# Altium PCB U_I_Meter_Bottom_ACS712.PcbDoc
Units mm, origin at the board's own origin, x right, y up, seen from the top; angles counter-clockwise.
Board outline 67 x 84 mm, 2 copper layers (Top Layer, Bottom Layer), stack 1.071 mm thick; 47 components, 21 nets, 113 pads, 119 vias.
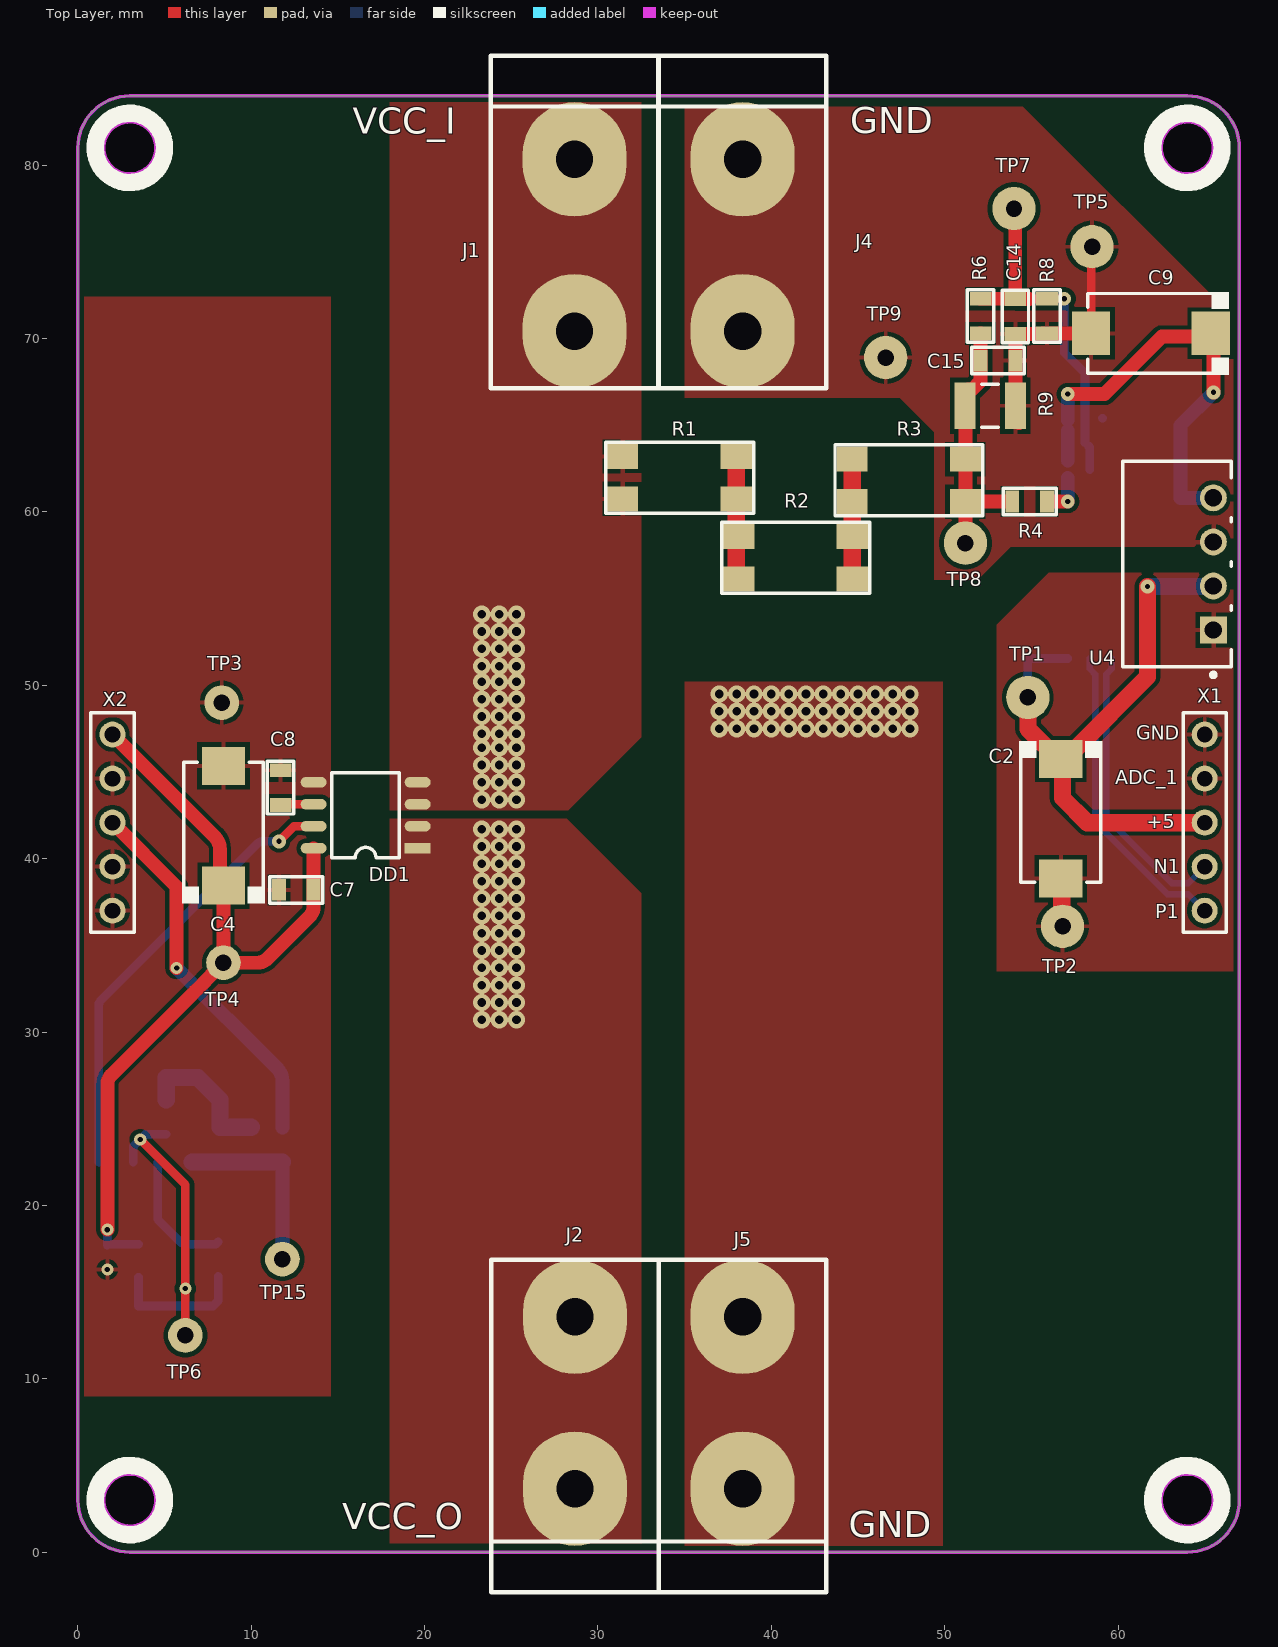
[diagram p0: Top Layer view]
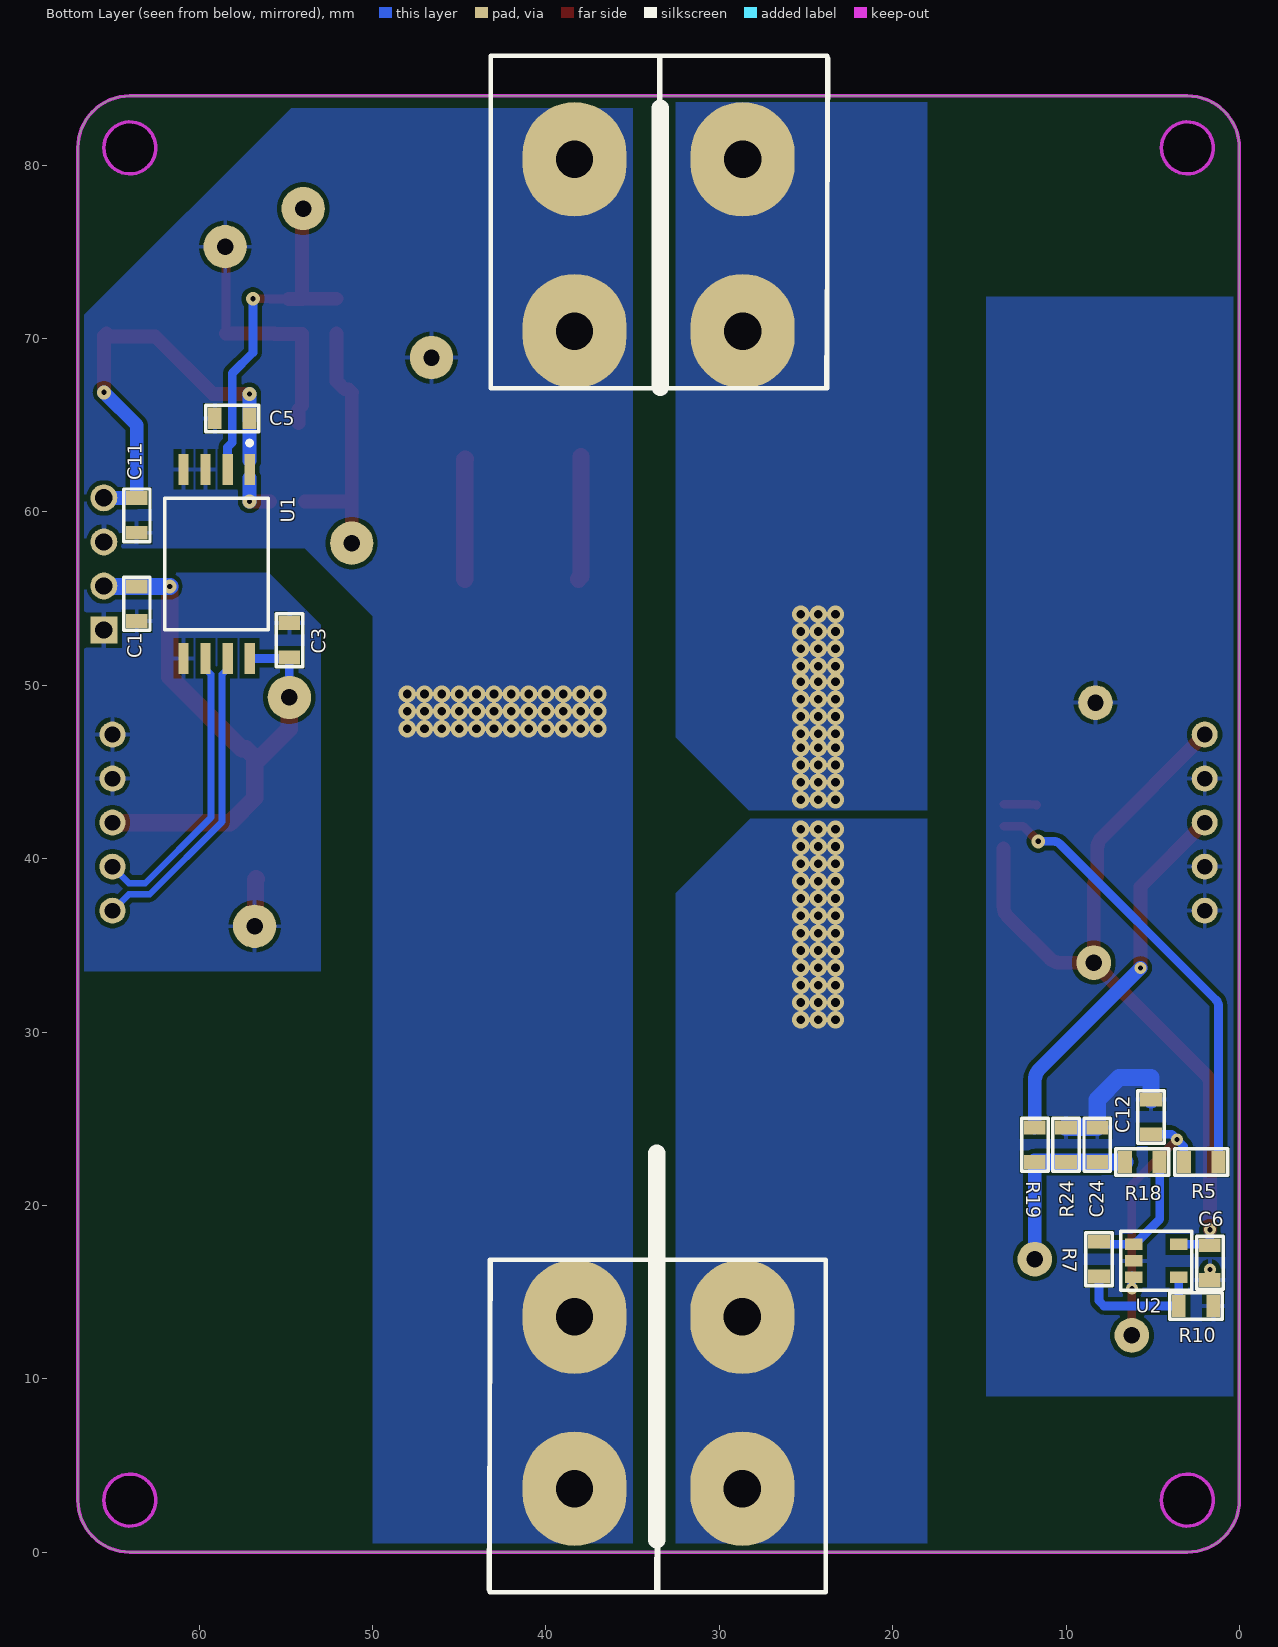
[diagram p1: Bottom Layer view, seen from below]
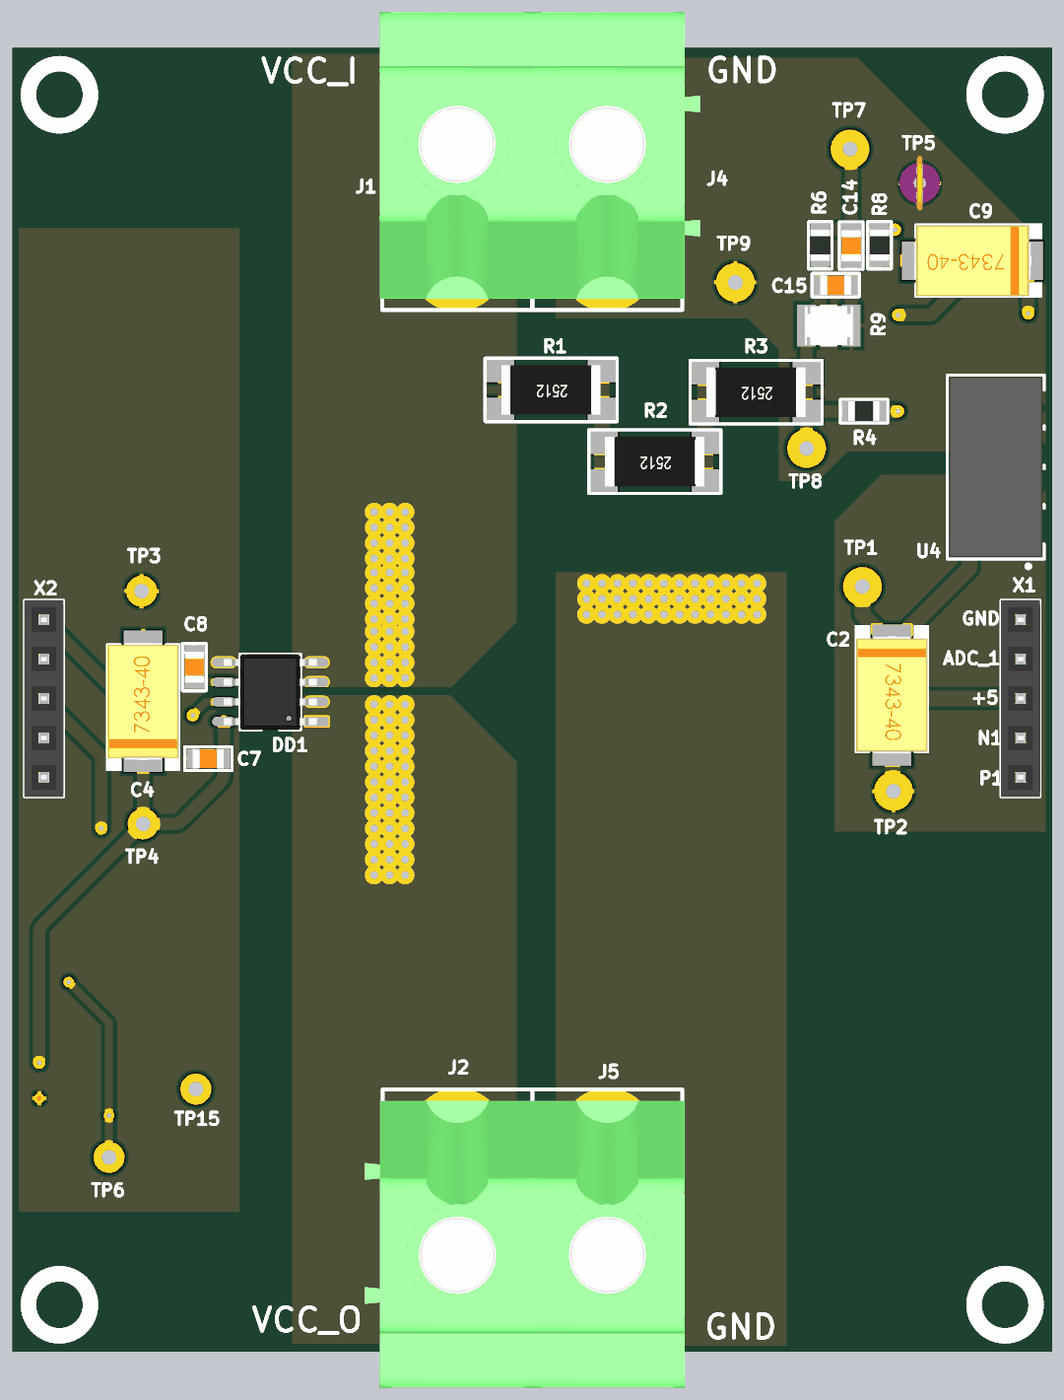
[diagram p2: 3D render of the assembled board from above, using the file's embedded part models]
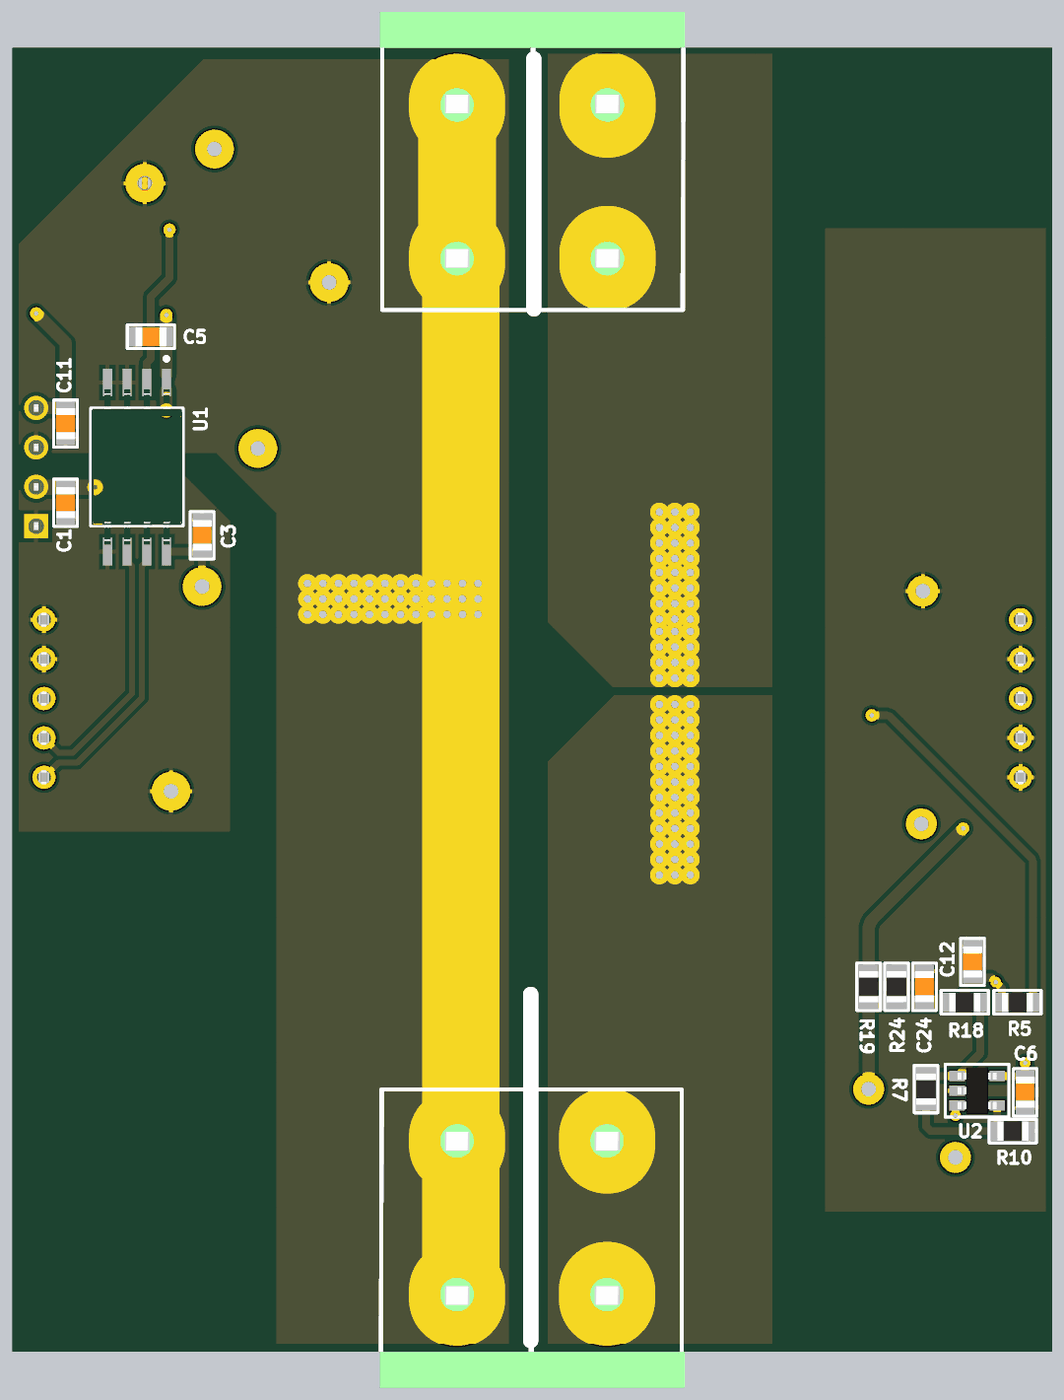
[diagram p3: 3D render of the assembled board from below, using the file's embedded part models]

## Layer stack, top to bottom
Top Solder: solder mask 0.0102, Solder Resist, Dk 3.5
Top Layer: signal copper 0.0356
Dielectric 1: dielectric 1, FR-4, Dk 4.8
Bottom Layer: signal copper 0.0356
Bottom Solder: solder mask 0.0102, Solder Resist, Dk 3.5

## Board outline
3,0 cw(c3,3) 0,3 0,81 cw(c3,81) 3,84 64,84 cw(c64,81) 67,81 67,3 cw(c64,3) 64,0
cut-out: 62.5,3 ccw(c64,3) 64,1.5 ccw(c64,3) 65.5,3 ccw(c64,3) 64,4.5 ccw(c64,3)
cut-out: 3,1.5 cw(c3,3) 1.5,3 cw(c3,3) 3,4.5 cw(c3,3) 4.5,3 cw(c3,3)
cut-out: 3,79.5 cw(c3,81) 1.5,81 cw(c3,81) 3,82.5 cw(c3,81) 4.5,81 cw(c3,81)
cut-out: 64,79.5 cw(c64,81) 62.5,81 cw(c64,81) 64,82.5 cw(c64,81) 65.5,81 cw(c64,81)

## Design rules (kind name [scope] priority, off if disabled: settings)
Clearance [All] p1: gap=0.254 ignorepadtopadclearanceinfootprint=FALSE
ComponentClearance [All] p1: gap=-1 collisioncheckmode=3 verticalgap=0 showdistances=FALSE
DiffPairsRouting [All] p1: maxlimit=0.254 minlimit=0.254 mostfreqgap=0.254 toplayer_minwidth=0.381 toplayer_maxwidth=0.381 toplayer_prefwidth=0.381 bottomlayer_minwidth=0.381 bottomlayer_maxwidth=0.381 bottomlayer_prefwidth=0.381 maxuncoupledlength=12.7
Height [All] p1: minheight=-1 maxheight=50 prefheight=12.7
PolygonConnect [All] p1: connectstyle=Relief reliefconductorwidth=0.254 reliefentries=4 polygonreliefangle="90 Angle" airgapwidth=0.254
RoutingVias [All] p1: holewidth=0.711 width=1.27 viastyle="Through Hole" minholewidth=0.711 minwidth=1.27 maxholewidth=0.711 maxwidth=1.27
SolderMaskExpansion [All] p1: expansion=0.102 istentingtop=FALSE
Width [All] p1: maxlimit=10 minlimit=0.254 preferedwidth=0.254 minimp=50.000000 maximp=50.000000 favimp=50.000000
27 further rules are at their usual default settings.

## Classes and differential pairs
differential pair OUT: +OUT_P -OUT_N

## Components (designator, comment, footprint, x,y, rotation, side; value= is the part's Value field where it differs from the comment)
C1 "0.1uF" CAP-0805 63.6,54.7 r270 bottom
C2 "47uF_16V" CAP-TAN-D 56.7,42.3 r270 top
C3 "0.1uF" CAP-0805 54.8,52.6 r90 bottom
C4 "100uF_16V" CAP-TAN-D 8.4,41.9 r90 top
C5 "0.1uF" CAP-0805 58.1,65.4 r180 bottom
C6 "0.1uF" CAP-0805 1.7,16.7 r90 bottom
C7 "100nF" CAP-0805 12.6,38.2 r180 top
C8 "100nF" CAP-0805 11.7,44.1 r90 top
C9 "100uF_16V" CAP-TAN-D 61.9,70.3 r180 top
C11 "0.1uF" CAP-0805 63.6,59.8 r270 bottom
C12 "270pF" CAP-0805 5.1,25.1 r270 bottom
C14 "0.33uF" CAP-0805 54.075,71.275 r90 top
C15 "0.1uF" CAP-0805 53.075,68.725 r180 top
C24 "220pF" CAP-0805 8.2,23.5 r270 bottom
DD1 "ACS712" SO8-150 16.6,42.5 r180 top
J1 "MG_136_HT" Conn_MEIGAN_MG136HT 28.65,77.8 r180 top
J2 "MG_136_HT" Conn_MEIGAN_MG136HT 28.675,6.2 r0 top
J4 "MG_136_HT" Conn_MEIGAN_MG136HT 38.35,77.8 r180 top
J5 "MG_136_HT" Conn_MEIGAN_MG136HT 38.35,6.2 r0 top
R1 "" RES-2512 34.7,61.975 r180 top
R2 "" RES-2512 41.4,57.35 r180 top
R3 "" RES-2512 47.925,61.825 r180 top
R4 "" RES-0805 54.9,60.6 r0 top
R5 "1K" RES-0805 2.2,22.5 r0 bottom
R6 "1K" RES-0805 52.075,71.3 r90 top
R7 "1K" RES-0805 8.1,16.9 r90 bottom
R8 "1M" RES-0805 55.9,71.3 r90 top
R9 "RES_1210" RES_SMD_1210_IPC_B 52.625,66.125 r180 top
R10 "100K" RES-0805 2.5,14.2 r0 bottom
R18 "10K" RES-0805 5.6,22.5 r0 bottom
R19 "1K" RES-0805 11.8,23.5 r90 bottom
R24 "36K" RES-0805 10,23.5 r270 bottom
TP1 "Test_Point_PCB" Test_Point#1 54.8,49.3 r0 top
TP2 "Test_Point_PCB" Test_Point#1 56.8,36.1 r0 top
TP3 "Test_Point_PCB" Test_Point#2 8.3,49 r0 top
TP4 "Test_Point_PCB" Test_Point#2 8.4,34 r0 top
TP5 "Test_Point_PCB" Pin_Test_Point(Pink) 58.5,75.3 r0 top
TP6 "Test_Point_PCB" Test_Point#2 6.2,12.5 r0 top
TP7 "Test_Point_PCB" Test_Point#1 54,77.5 r0 top
TP8 "Test_Point_PCB" Test_Point#1 51.2,58.2 r90 top
TP9 "Test_Point_PCB" Test_Point#1 46.6,68.9 r0 top
TP15 "Test_Point_PCB" Test_Point#2 11.8,16.9 r90 top
U1 "AMC1311" FP-DWV0008A-MFG 59,57 r270 bottom locked
U2 "MCP6001T-I/OT" SOT23-5 4.8,16.8 r180 bottom
U4 "B0505S-1W" B0505S-1W 63.4,57 r90 top locked
X1 "CONN-5-PIN" CONN-PLS-5-2.54mm 65,37 r90 top locked
X2 "CONN-5-PIN" CONN-PLS-5-2.54mm 2,37 r90 top locked

## Footprints (in the part's own frame and the unit in brackets; to place one, negate y for a bottom-side part, rotate by r counter-clockwise, add the part's x,y. Pads: shape width x height; smd on the part's side, far side on the other; paste and mask are expansions set on the pad)
B0505S-1W [mm]
  rect 1.55x1.55 hole 1 paste-2539.97 mask+0: 1(-3.81,-2.1)
  round 1.55 hole 1 paste-2539.97 mask+0: 2(-1.27,-2.1) 3(1.27,-2.1) 4(3.81,-2.1)
  silkscreen extent -6.52,-3.13 5.92,3.13, body extent -6.02,-3.22 6.02,3.22, height 0.25
CAP-0805 [mm]
  rect 0.8x1.25 smd mask+0.015: 1(-1,0) 2(1,0)
  silkscreen extent -1.52,-0.76 1.52,0.76, body extent -1,-0.62 1,0.63, height 0.8
CAP-TAN-D [mm]
  rect 2.2x2.5 smd: 1(-3.45,0) 2(3.45,0)
  silkscreen extent -4.5,-2.4 3.65,2.4, body extent -3.8,-2.3 3.8,2.3, height 4
CONN-PLS-5-2.54mm [mm]
  round 1.5 hole 0.9: 1(0,0) 2(2.54,0) 3(5.08,0) 4(7.62,0) 5(10.16,0)
  silkscreen extent -1.25,-1.25 11.41,1.25, body extent -1.27,-1.27 11.43,1.27, height 8.4
Conn_MEIGAN_MG136HT [mm]
  oval 6x6.6 hole 2.159: 1(0,7.366) 1(0,-2.54)
  silkscreen extent -4.83,-8.51 4.83,10.67, body extent -6,-8.55 5,9.95, height 30.95
FP-DWV0008A-MFG [mm]
  rect 1.8x0.6 smd paste+0 mask+0: 1(-5.45,1.905) 2(-5.45,0.635) 3(-5.45,-0.635) 4(-5.45,-1.905) 5(5.45,-1.905) 6(5.45,-0.635) 7(5.45,0.635) 8(5.45,1.905)
  silkscreen extent -7.1,-2.98 3.8,2.98, body extent -5.75,-2.93 5.75,2.93, height 2.8
Pin_Test_Point(Pink) [mm]
  round 2.5 hole 0.95: 1(0,0)
  body extent -1.3,-1.78 1.3,1.78, height 6.93
RES-0805 [mm]
  rect 0.8x1.25 smd mask+0.015: 1(-1,0) 2(1,0)
  silkscreen extent -1.52,-0.76 1.52,0.76, body extent -1,-0.62 1,0.63, height 0.6
RES-2512 [mm]
  rect 1.8x1.45 smd: 1(-3.275,-1.225) 1(-3.275,1.225) 2(3.275,-1.225) 2(3.275,1.225)
  silkscreen extent -4.28,-2.05 4.25,2.05, body extent -3.2,-1.6 3.2,1.6, height 0.6
RES_SMD_1210_IPC_B [mm]
  rect 1.205x2.706 smd paste+0 mask+0: 1(-1.451,0) 2(1.451,0)
  silkscreen extent -0.47,-1.25 0.47,1.25, body extent -2.3,-1.6 2.3,1.6, height 0.25
SO8-150 [mm]
  rect 1.5x0.6 smd: 1(-3,1.9)
  oval 1.5x0.6 smd: 2(-3,0.63) 3(-3,-0.64) 4(-3,-1.91) 5(3,-1.91) 6(3,-0.64) 7(3,0.63) 8(3,1.9)
  silkscreen extent -1.95,-2.45 1.95,2.45, body extent -3,-2.45 3,2.45, height 1.7
SOT23-5 [mm]
  rect 1x0.66 smd: 1(-1.3,0.95) 2(-1.3,0) 3(-1.3,-0.95) 4(1.3,-0.95) 5(1.3,0.95)
  silkscreen extent -2.05,-1.7 2.05,1.7, body extent -1.25,-1.5 1.25,1.5, height 1.08
Test_Point#1 [mm]
  round 2.5 hole 0.95: 1(0,0)
Test_Point#2 [mm]
  round 2 hole 0.95: 1(0,0)

## Part data
C1 C3 C5 C6 C11 C12 C14 C15 C24: library part CAP-NON-POLAR
C2: library part CAP-POLAR
C4 C9: library part CAP_POL_SMD
C7 C8: library part CAP-NON-POLAR, "270pF"
J1 J2 J4 J5: library part Connector_MEIGAN_MG136HT
R1 R2 R3 R4 R5 R6 R8 R10 R18 R24: library part RES-CONST
R7 R19: library part RES-CONST, "10K"
TP1 TP2 TP3 TP4 TP5 TP6 TP7 TP8 TP9 TP15: library part TP_PCB?, "Test_Point"
U2: library part MCP6001T, "IC OPAMP GP 1 CIRCUIT SOT23-5", Case/Package=SOT-23, Input Bias Current=1pA, Input Offset Voltage (Vos)=4.5mV, Max Operating Temperature=85°C, Max Supply Voltage=6V, Min Operating Temperature=-40°C, Min Supply Voltage=1.8V, Nominal Supply Current=100uA, Operating Supply Voltage=5.5V, Output Current=23mA, Package Quantity=1, Power Supply Rejection Ratio (PSRR)=86dB, Voltage Gain=112dB, Bandwidth=1MHz, Common Mode Rejection Ratio=60dB, Contact Plating=Tin, Gain Bandwidth Product=1MHz, Height=1.3mm, Lead Free="Lead Free", Length=3.1mm, Mount="Surface Mount", Number of Amplifiers=1, Number of Channels=1, Number of Circuits=1, Number of Elements=1, Number of Pins=5, Operating Supply Current=100uA, Output Current per Channel=23mA, Packaging="Tape and Reel", Radiation Hardening=No, REACH SVHC="No SVHC", Slew Rate=0.6V/µs, Unity Gain Bandwidth Product=1MHz, Voltage=6V, Width=1.8mm

## Via types
v1: diameter 1, hole 0.5, Top Layer to Bottom Layer, 108 vias
v2: diameter 0.8, hole 0.3, Top Layer to Bottom Layer, 6 vias
v3: diameter 0.7, hole 0.3, Top Layer to Bottom Layer, 5 vias

## Nets (pads, with @x,y where several pads share a name; then routed paths per layer and width w, separated by ;. In a path a pad name is that pad's centre, name@x,y a point inside that pad or via, vN(x,y) a via of type N, cw(c..) or ccw(c..) an arc to the next point about the centre after c; other vN are vias at no path point)
+5: C1.1 C2.1 C3.1 TP1.1 U1.8 U4.2 X1.3 | length 35.9
  Top Layer w1: TP1.1 54.804,49.296 54.804,47.496 C2.1@56.625,45.675 ; C2.1 57.3,46.35 57.55,46.35 61.7,50.5 v2(61.7,55.7) ; C2.1@56.8,45.5 56.8,43.5 58.22,42.08 X1.3
  Bottom Layer w0.5: C3.1@54.65,51.55 C3.1@54.8,51.55 ; TP1.1@54.8,49.3 C3.1@54.8,51.55 ; C3.1 C3.1@54.8,51.55 ; U1.8 C3.1@54.8,51.55
  Bottom Layer w1: v2(61.7,55.7) U4.2@65.47,55.7
+5V_I: C4.1 C6.2 C7.1 DD1.8 TP4.1 U2.5 X2.5 | length 46.9
  Top Layer w0.8: v3(1.7,18.6) 1.7,26.969 cw(c2.5,26.969) 1.934,27.534 ; 1.934,27.534 6.718,32.318 cw(c7.282,31.751) 6.79,32.381 ccw(c6,33.4) 6.919,32.496 7.888,33.488 cw(c8.46,32.929) 7.893,33.493 TP4.1 10.369,34 ccw(c10.369,34.8) 10.934,34.234 13.366,36.666 ccw(c12.8,37.231) 13.6,37.231 C7.1 DD1.8 ; X2.5 7.907,41.253 cw(c7.2,40.546) 8.2,40.546 8.2,39.05 C4.1 TP4.1@8.4,33.727
  Bottom Layer w0.5: v3(1.7,18.6) C6.2 1.75,17.75 U2.5
GND: C5.1 C9.2 C11.2 C14.1 C15.1 J4.1 J5.1 R8.1 R9.1 TP5.1 TP9.1 U1.3 U1.4 U4.3 | length 14.9
  Top Layer w0.5: C9.2 58.45,75.25 TP5.1
  Top Layer w0.8: J5.1@38.35,16.131 J5.1@38.5,16.281 ; R9.1@54.278,65.122 54.278,65.923 R9.1 54.076,68.725 54.076,70.275 55.65,70.275 55.675,70.3 C9.2
  other v1: 37,47.5 38,47.5 39,47.5 40,47.5 41,47.5 42,47.5 43,47.5 44,47.5 45,47.5 46,47.5 47,47.5 48,47.5 37,48.5 38,48.5 39,48.5 40,48.5 41,48.5 42,48.5 43,48.5 44,48.5 45,48.5 46,48.5 47,48.5 48,48.5 37,49.5 38,49.5 39,49.5 40,49.5 41,49.5 42,49.5 43,49.5 44,49.5 45,49.5 46,49.5 47,49.5 48,49.5
GND_III: C1.2 C2.2 C3.2 TP2.1 U1.5 U4.1 X1.4 X1.5 | length 2.8
  Top Layer w1: C2.2 56.75,38.8 56.75,36.15 TP2.1
GND_IV: C4.2 C6.1 C7.2 C8.2 C12.1 C24.1 DD1.5 R10.1 R24.1 TP3.1 U2.2 X2.1 X2.2 X2.4 | length 8.3
  Bottom Layer w1: C12.1 5.1,27.375 6.925,27.375 8.2,26.1 C24.1 R24.1
  other v3: 1.7,16.3
NetC8_1: C8.1 DD1.6 | length 1.9
  Top Layer w0.5: C8.1 12.075,43.14 DD1.6
NetC12_2: C12.2 R5.2 TP6.1 U2.3 | length 16.2
  Top Layer w0.5: v3(3.6,23.8) 6.2,21.2 TP6.1
  Bottom Layer w0.5: R5.2 3.2,23.4 v3(3.6,23.8) 3.9,24.1 C12.2 ; v3(6.2,15.2) U2.3@6.2,15.925
NetC14_2: C14.2 R6.2 R8.2 TP7.1 U1.2 | length 20.5
  Top Layer w0.5: 54.862,72.275 54.872,72.285 55.9,72.285 55.915,72.3 v2(56.9,72.3)
  Top Layer w0.8: R6.2 C14.2@54.075,72.3 ; TP7.1 54.075,77.425 C14.2@54.075,72.3 ; 54.862,72.275 C14.2 C14.2@54.075,72.3
  Bottom Layer w0.5: v2(56.9,72.3) 56.9,69.2 58.1,68 58.1,64 58.365,63.735 U1.2
NetC15_2: C15.2 R3.1 R4.1 R6.1 R9.2 TP8.1 | length 15.8
  Top Layer w0.8: TP8.1@51.2,57.7 R3.1@51.2,60.6 ; R6.1 C15.2 52.075,67.547 51.606,67.078 51.377,67.078 51.174,66.876 51.2,66.85 51.2,63.05 R3.1@51.2,60.6 ; R4.1 R3.1@51.2,60.6
NetC24_2: C24.2 R18.2 R19.1 R24.2 TP15.1 | length 10.8
  Bottom Layer w0.8: TP15.1 R19.1
  Bottom Layer w1: R18.2 C24.2@7.975,22.5 ; C24.2@7.975,22.5 R24.2 R19.1
NetDD1_1: DD1.1 DD1.2 J2.1
  other v1: 23.3,30.7 24.3,30.7 25.3,30.7 23.3,31.7 24.3,31.7 25.3,31.7 23.3,32.7 24.3,32.7 25.3,32.7 23.3,33.7 24.3,33.7 25.3,33.7 23.3,34.7 24.3,34.7 25.3,34.7 23.3,35.7 24.3,35.7 25.3,35.7 23.3,36.7 24.3,36.7 25.3,36.7 23.3,37.7 24.3,37.7 25.3,37.7 23.3,38.7 24.3,38.7 25.3,38.7 23.3,39.7 24.3,39.7 25.3,39.7 23.3,40.7 24.3,40.7 25.3,40.7 23.3,41.7 24.3,41.7 25.3,41.7
NetDD1_3: DD1.3 DD1.4 J1.1 R1.2
  other v1: 23.3,43.4 24.3,43.4 25.3,43.4 23.3,44.4 24.3,44.4 25.3,44.4 23.3,45.4 24.3,45.4 25.3,45.4 23.3,46.4 24.3,46.4 25.3,46.4 23.3,47.2 24.3,47.2 25.3,47.2 23.3,48.2 24.3,48.2 25.3,48.2 23.3,49.2 24.3,49.2 25.3,49.2 23.3,50.2 24.3,50.2 25.3,50.2 23.3,51.1 24.3,51.1 25.3,51.1 23.3,52.1 24.3,52.1 25.3,52.1 23.3,53.1 24.3,53.1 25.3,53.1 23.3,54.1 24.3,54.1 25.3,54.1
NetDD1_7: DD1.7 R5.1 | length 25.8
  Top Layer w0.5: v2(11.6,41) 12.47,41.87 DD1.7
  Bottom Layer w0.5: R5.1 1.2,31.493 cw(c1.7,31.493) 1.346,31.846 10.354,40.854 cw(c10.707,40.5) 10.707,41 v2(11.6,41)
NetR1_1: R1.1 R2.2 | length 7.1
  Top Layer w1: R1.1@37.975,63.2 37.975,60.75 37.975,56.275 R2.2@38.125,56.125
NetR2_1: R2.1 R3.2 | length 6.9
  Top Layer w1: R3.2@44.65,63.05 44.675,63.025 44.675,58.575 R2.1@44.675,56.125
NetR7_1: R7.1 R10.2 U2.4 | length 7.7
  Bottom Layer w0.5: R10.2 U2.4 ; R10.2@3.6,14.2 7.807,14.2 8.1,14.493 R7.1
NetR7_2: R7.2 R18.1 U2.1 | length 7.3
  Bottom Layer w0.5: R18.1 4.6,19.2 5.925,17.875 5.975,17.875 5.995,17.855 U2.1@5.995,17.825 ; U2.1 7.95,17.75 R7.2
NetR19_2: R19.2 X2.3 | length 21.6
  Top Layer w0.8: X2.3 5.7,38.38 v3(5.7,33.7)
  Bottom Layer w0.8: v3(5.7,33.7) 11.508,27.892 cw(c10.942,27.326) 11.512,27.888 cw(c10.8,27.186) 11.8,27.186 R19.2
  Bottom Layer w1: X2.3 ccw(c2.609,42.525) X2.3@2.001,42.078
OUT_N: U1.6 X1.2 | length 16.9
  Bottom Layer w0.381: U1.6 59.635,50.95 59.317,50.632 59.317,42.383 63.113,38.587 64.047,38.587 X1.2
OUT_P: U1.7 X1.1 | length 18
  Bottom Layer w0.381: U1.7 58.365,50.95 58.682,50.632 58.682,42.119 62.849,37.952 64.047,37.952 X1.1
VCC_ISO: C5.2 C9.1 C11.1 R4.2 U1.1 U4.4 | length 27.8
  Top Layer w0.8: R4.2 v2(57.1,60.6) ; v2(57.1,66.8) 59.216,66.8 62.534,70.119 65.169,70.119 C9.1 65.5,70.15 v2(65.5,66.9)
  Bottom Layer w0.8: v2(57.1,60.6) U1.1@57.1,61.95 ; U1.1@57.1,62.95 57.1,64.707 ; C5.2@57.1,65.3 C5.2 v2(57.1,66.8) ; U4.4 65.49,60.8 C11.1 63.6,65 v2(65.5,66.9)

## Polygon pours and split planes (outlines as drawn)
GND on Top Layer "NONET_L-01_P-001" (solid, pour order 15): 35.019,50.2 35.019,0.296 49.9,0.296 49.9,50.2
NetDD1_1 on Top Layer "NONET_L-01_P-001" (solid, pour order 14): 18,42.3 18,0.5 32.5,0.5 32.5,38 28.2,42.3
NetDD1_3 on Top Layer "NONET_L-01_P-001" (solid, pour order 13): 32.5,83.7 18,83.7 18,42.8 28.3,42.8 32.5,47
GND_IV on Top Layer "NONET_L-01_P-001" (solid, pour order 4): 14.6,72.4 0.2,72.4 0.2,9 14.6,9
GND on Top Layer "NONET_L-01_P-001" (solid, remove dead copper, pour order 10): 66.913,57.987 53.813,57.987 51.913,56.087 49.413,56.087 49.413,64.587 47.413,66.587 35.013,66.587 35.013,83.387 35.613,83.387 54.513,83.387 66.913,70.987 66.913,69.887
GND_III on Top Layer "NONET_L-01_P-001" (solid, pour order 7): 67,33.5 53,33.5 53,53.5 56,56.5 67,56.5
NetDD1_1 on Bottom Layer "NONET_L-01_P-001" (solid, pour order 12): 18,42.3 18,0.5 32.5,0.5 32.5,38 28.2,42.3
NetDD1_3 on Bottom Layer "NONET_L-01_P-001" (solid, pour order 11): 32.5,83.7 18,83.7 18,42.8 28.3,42.8 32.5,47
GND_IV on Bottom Layer "NONET_L-01_P-001" (solid, pour order 5): 14.6,72.4 0.2,72.4 0.2,9 14.6,9
GND on Bottom Layer "NONET_L-01_P-001" (solid, remove dead copper, pour order 8): 67,57.9 53.9,57.9 49.5,53.5 49.5,64.5 47.5,66.5 35.1,66.5 35.1,83.3 35.7,83.3 54.7,83.3 67,71 67,69.8
GND on Bottom Layer "NONET_L-01_P-001" (solid, pour order 9): 35,83.3 35,0.5 50,0.5 50,83.3
GND_III on Bottom Layer "NONET_L-01_P-001" (solid, pour order 6): 67,33.5 53,33.5 53,53.5 56,56.5 67,56.5

## Keep-outs
Keep-Out Layer:
  circle w0.2: c3,3 r1.5
  circle w0.2: c64,3 r1.5
  circle w0.2: c64,81 r1.5
  circle w0.2: c3,81 r1.5
  lines w0.2: 0,3 ccw(c3,3) 3,0 64,0 ccw(c64,3) 67,3 67,81 ccw(c64,81) 64,84 3,84 ccw(c3,81) 0,81 0,3

## Silkscreen, mask and mechanical layers (free items; w line width, h text height)
Top Overlay:
  circle w1: c64,81 r2
  circle w1: c3,81 r2
  circle w1: c3,3 r2
  circle w1: c64,3 r2
  text "GND" at 44.554,81.854 h1.52
  text "VCC_I" at 15.854,81.808 h1.52
  text "GND" at 61.054,46.854 h0.8
  text "ADC_1" at 59.854,44.287 h0.8
  text "+5" at 61.654,41.754 h0.8
  text "N1" at 62.054,39.154 h0.8
  text "P1" at 62.154,36.554 h0.8
  text "VCC_O" at 15.254,1.308 h1.52
  text "GND" at 44.454,0.854 h1.52
Bottom Overlay:
  lines w1: 33.4,67.2 33.4,83.3 ; 33.6,0.7 33.6,23
Bottom Solder:
  lines w3: 28.534,70.434 28.65,70.434
  lines w5: 38.35,3.66 38.1,3.91 38.1,70.4 38.35,70.65 38.35,80.34